# Altium PCB LightSwitch.PcbDoc
Units mm, origin at the board's own origin, x right, y up, seen from the top; angles counter-clockwise.
Board outline 45 x 95 mm, 2 copper layers (Top Layer, Bottom Layer); 22 components, 16 nets, 79 pads, 0 vias.
Unrouted connection lines stored in the file: 38.
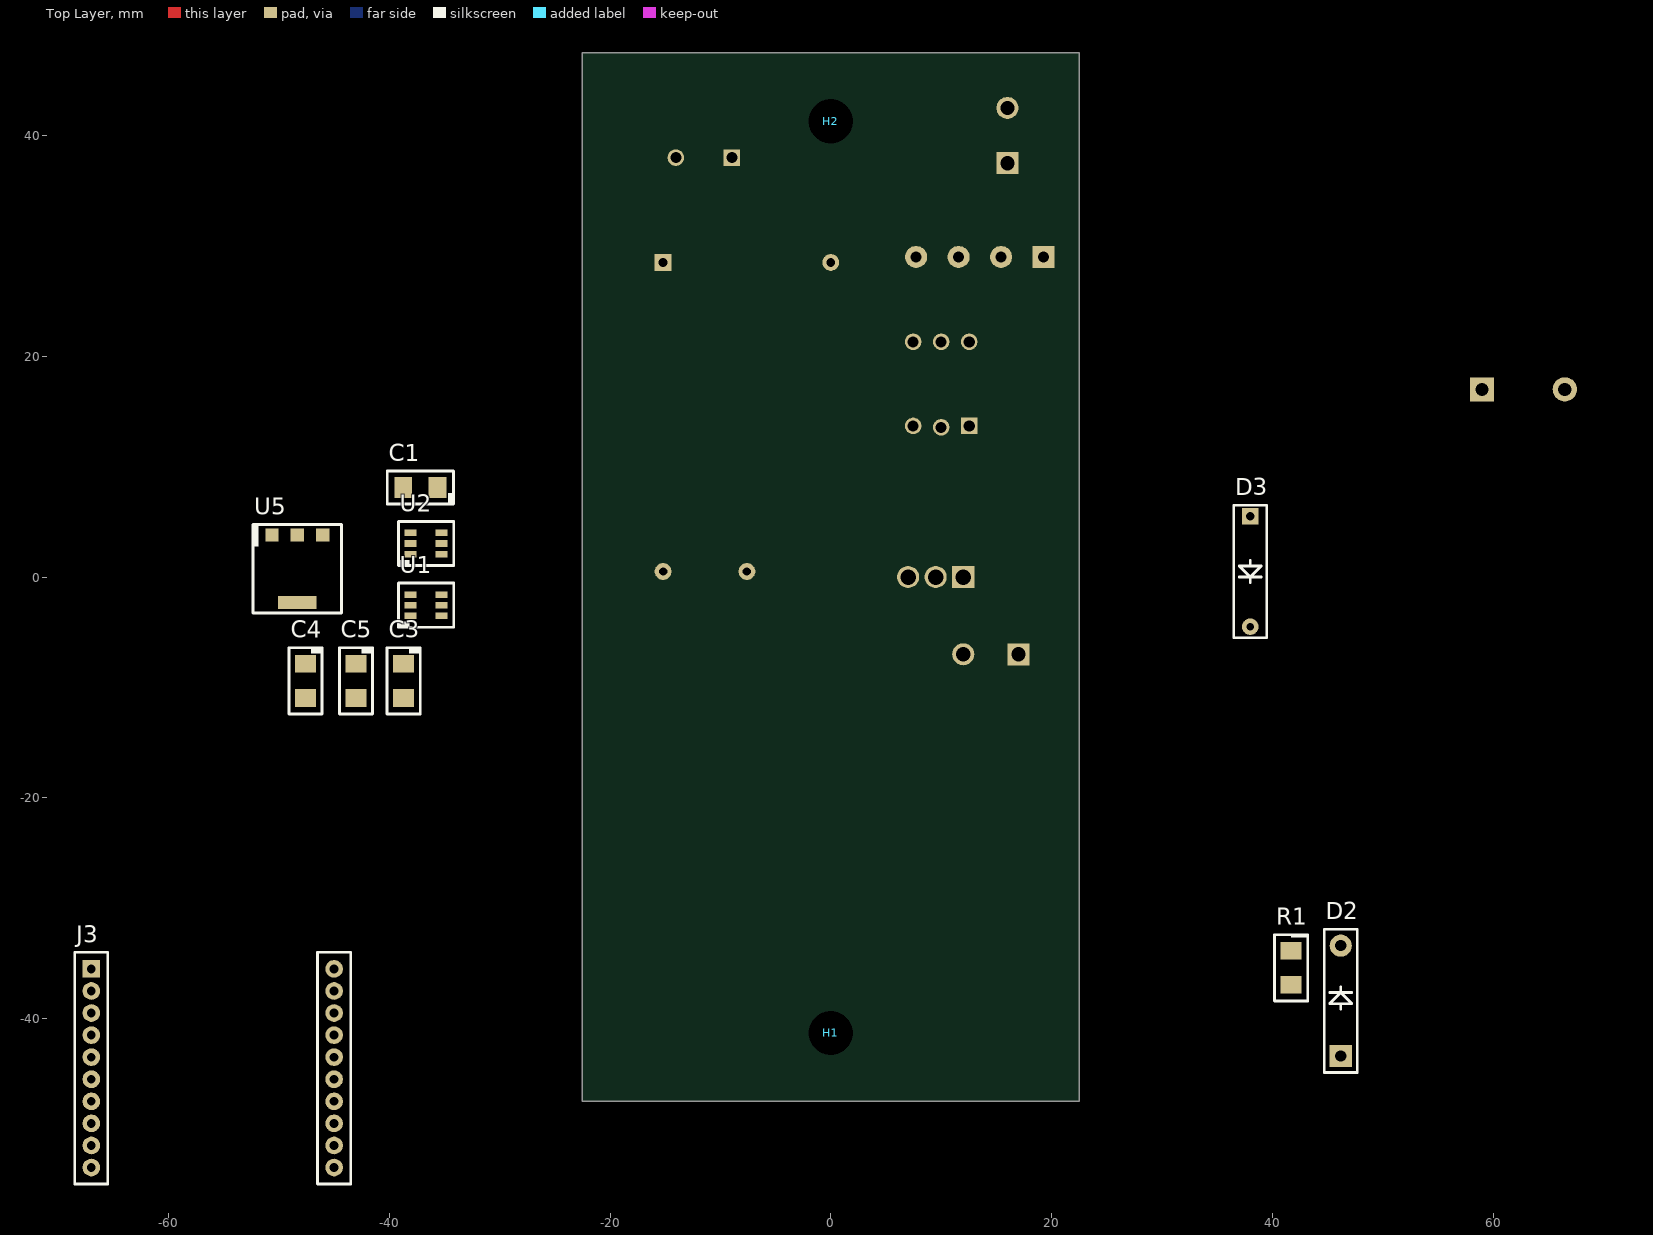
[diagram p0: Top Layer view]
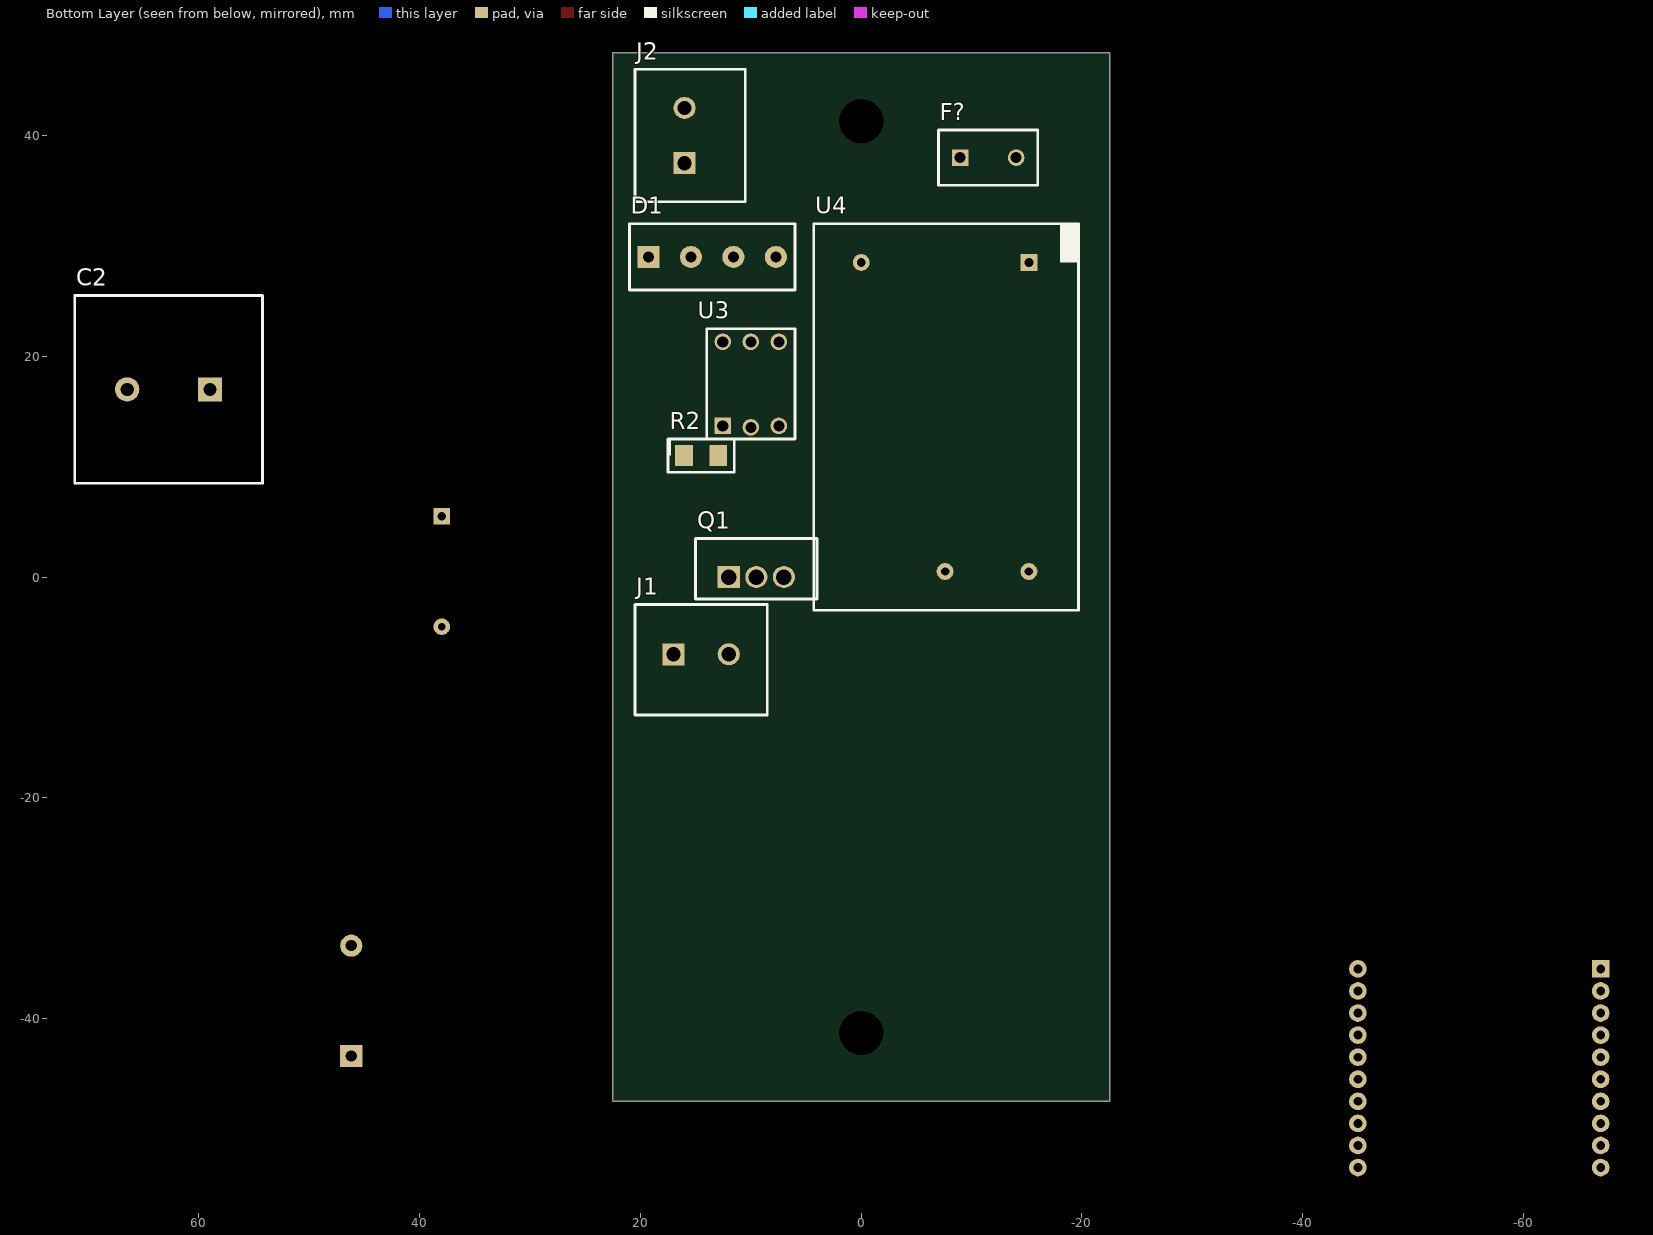
[diagram p1: Bottom Layer view, seen from below]

## Layer stack, top to bottom
Top Solder: solder mask 0.0102, Solder Resist, Dk 3.5
Top Layer: signal copper 0.0356
Dielectric 1: dielectric 0.32, FR-4, Dk 4.8
Bottom Layer: signal copper 0.0356
Bottom Solder: solder mask 0.0102, Solder Resist, Dk 3.5

## Board outline
22.5,-47.5 22.5,47.5 -22.5,47.5 -22.5,-47.5

## Design rules (kind name [scope] priority, off if disabled: settings)
Clearance [All] p1: gap=0.254 ignorepadtopadclearanceinfootprint=FALSE except(0: Arc-Hole Track-Hole SMDPad-Hole THPad-Hole Via-Hole Fill-Hole Poly-Hole Region-Hole Text-Hole)
PolygonConnect [All] p1: connectstyle=Relief reliefconductorwidth=0.254 reliefentries=4 polygonreliefangle="90 Angle" airgapwidth=0.254
RoutingVias [All] p1: holewidth=0.711 width=1.27 viastyle="Through Hole" minholewidth=0.711 minwidth=1.27 maxholewidth=0.711 maxwidth=1.27
SolderMaskExpansion [All] p1: expansion=0.102
Width [All] p1: maxlimit=0.254 minlimit=0.254 preferedwidth=0.254
30 further rules are at their usual default settings.

## Classes and differential pairs
component class XBee: J3
component class Power: C3 C4 C5 F? H1 H2 J2 U4 U5
component class Dimmer: C1 C2 D1 D2 D3 J1 Q1 R1 R2 U1 U2 U3

## Components (designator, comment, footprint, x,y, rotation, side; value= is the part's Value field where it differs from the comment)
C1 "CAP" 1206 -37.178,8.118 r270 top value=.1uF
C2 "CAP" CAPM7 62.75,17 r0 bottom value=100uF
C3 "CAP" 1206 -38.702,-9.408 r0 top value=100uF
C4 "CAP" 1206 -47.592,-9.408 r0 top value=.1uF
C5 "CAP" 1206 -43.02,-9.408 r0 top value=10uF
D1 "KBPM" KBPM 13.5,29 r180 bottom
D2 "DIODE" DO41 46.2,-38.4 r90 top
D3 "ZENER" DO35 38,0.5 r0 top value=10V
F? "F_FUSE_0697H" 0697H -11.5,38 r180 bottom value=2A
H1 "H_MOUNTHOLE_MOUNTHOLE4MM" MOUNTHOLE4MM 0,-41.3 r0 top value=4mm
H2 "H_MOUNTHOLE_MOUNTHOLE4MM" MOUNTHOLE4MM 0,41.3 r0 top value=4mm
J1 "1935161" 1935161 14.5,-7 r180 bottom
J2 "1935161" 1935161 16,40 r90 bottom
J3 "XBee" XBEE -56,-44.5 r0 top
Q1 "Q_IRF510_TO-220AB" TO-220AB 9.5,0 r180 bottom
R1 "R_RES_1206" 1206 41.7,-35.4 r0 top value=100K
R2 "R_RES_1206" 1206 14.5,11 r90 bottom value=180
U1 "MCP4013T-103E/CH" SOT23-6 -36.67,-2.55 r270 top
U2 "LTC6992CS6-2" SOT23-6 -36.67,3.038 r270 top
U3 "MCT27X" DIP6 10,17.5 r90 bottom
U4 "IRM-02-5" IRM-02-5 -15.2,28.5 r270 bottom
U5 "LD1117S33TR" SOT223 -48.34,0.75 r180 top

## Footprints (in the part's own frame and the unit in brackets; to place one, negate y for a bottom-side part, rotate by r counter-clockwise, add the part's x,y. Pads: shape width x height; smd on the part's side, far side on the other; paste and mask are expansions set on the pad)
0697H [mm]
  rect 1.5x1.5 hole 1: 1(-2.54,0)
  round 1.5 hole 1: 2(2.54,0)
  silkscreen extent -4.5,-2.5 4.5,2.5, body extent -4.18,-2 4.18,2, height 8.1
1206 [mm]
  rect 1.9x1.6 smd: 1(0,1.55) 2(0,-1.55)
  silkscreen extent -1.5,-3 1.5,3, body extent -0.8,-1.6 0.8,1.6, height 1.5
1935161 [mm]
  rect 2x2 hole 1.3: 1(-2.5,0)
  round 2 hole 1.3: 2(2.5,0)
  silkscreen extent -6,-5.5 6,4.5, body extent -5.03,-5 5.54,4, height 11.4
CAPM7 [mm]
  rect 2.2x2.2 hole 1.2: 1(-3.75,0)
  round 2.2 hole 1.2: 2(3.75,0)
  silkscreen extent -8.5,-8.5 8.5,8.5, body extent -8.25,-8.25 8.25,8.25, height 26.4
DIP6 [mm]
  rect 1.5x1.5 hole 1: 1(-3.81,2.54)
  round 1.5 hole 1: 2(-3.935,0) 3(-3.81,-2.54) 4(3.81,-2.54) 5(3.81,0) 6(3.81,2.54)
  silkscreen extent -5,-4 5,4, body extent -3.93,-3.63 3.93,3.63, height 4.4
DO35 [mm]
  rect 1.5x1.5 hole 0.75: 1(0,5)
  round 1.5 hole 0.7: 2(0,-5)
  silkscreen extent -1.5,-6 1.5,6, body extent -0.92,-5.36 0.92,5.36, height 2.02
DO41 [mm]
  rect 2x2 hole 1: 1(-5,0)
  round 2 hole 1: 2(5,0)
  silkscreen extent -6.5,-1.5 6.5,1.5, body extent -5.4,-1.01 5.4,1.01, height 3.01
IRM-02-5 [mil] "IRM-02-5"
  rect 60x60 hole 31.5: 1(0,0)
  round 60 hole 31.5: 2(0,-598.43)
  round 60 hole 30: 3(1102.36,0) 4(1102.36,-299.21)
  silkscreen extent -138,-768 1240,177, body extent -112,-736 1215,138, height 591
KBPM [mm]
  rect 2x2 hole 1: 1(-5.775,0)
  round 2 hole 1: 2(-1.925,0) 3(1.925,0) 4(5.775,0)
  silkscreen extent -7.5,-3 7.5,3, body extent -7.29,-2.51 7.29,2.5, height 11.5
MOUNTHOLE4MM [mm]
  round 0 hole 4 unplated: ""(0,0)
SOT23-6 [mm]
  rect 0.6x1.1 smd: 1(0.96,-1.4) 2(0,-1.4) 3(-0.96,-1.4) 4(-0.96,1.4) 5(0,1.4) 6(0.96,1.4)
  silkscreen extent -2,-2.5 2,2.5, body extent -1.5,-1.42 1.5,1.42
SOT223 [mm]
  rect 1.2x1.2 smd: 1(2.3,-3.05) 2(0,-3.05) 3(-2.3,-3.05)
  rect 3.5x1.2 smd: 4(0,3.05)
  silkscreen extent -4,-4 4,4, body extent -3.25,-3.45 3.25,3.45
TO-220AB [mm]
  rect 2x2 hole 1.4: 1(-2.5,0)
  round 2 hole 1.4: 2(0,0) 3(2.5,0)
  silkscreen extent -5.5,-2 5.5,3.5, body extent -5.32,-1.75 5.33,3.05, height 19.5
XBEE [mm]
  rect 1.6x1.6 hole 0.8: 1(-11,9)
  round 1.6 hole 0.8: 2(-11,7) 3(-11,5) 4(-11,3) 5(-11,1) 6(-11,-1) 7(-11,-3) 8(-11,-5) 9(-11,-7) 10(-11,-9) 11(11,-9) 12(11,-7) 13(11,-5) 14(11,-3) 15(11,-1) 16(11,1) 17(11,3) 18(11,5) 19(11,7) 20(11,9)
  silkscreen extent -12.5,-10.5 12.5,10.5, body extent -12,-10 12,10, height 3.99

## Part data
C1 C4: library part C_CAP_1206, Rating=25V
C2: library part C_CAPP_CAPM7, Rating=200V
C3: library part C_CAP_1206, Rating=10V
C5: library part C_CAP_1206, Rating=16V
D1: library part D_KBPM_KBMP
D2: library part D_DIODE_DO41, Rating=1A
D3: library part D_ZENER_DO35, Rating=500mW
F?: Rating=350VAC
J1 J2: library part J_2POSTERM_1935161
J3: library part J_XBEE_XBEE
Q1: Rating=5.6A
R1 R2: Rating=1/4W
U1: library part "U_ MCP4013T-103E/CH_SOT23-6"
U2: library part U_LTC6992CS6-2_SOT23-6
U3: library part U_MCT27X_DIP6
U4: library part U_IRM-02-5_IRM-02-5
U5: library part U_LD1117S33TR_SOT223

## Nets (pads, with @x,y where several pads share a name; then routed paths per layer and width w, separated by ;. In a path a pad name is that pad's centre, name@x,y a point inside that pad or via, vN(x,y) a via of type N, cw(c..) or ccw(c..) an arc to the next point about the centre after c; other vN are vias at no path point)
1V: U1.6
3V3: C5.1 J3.1 U5.2 U5.4
5V: C1.1 C3.1 C4.1 U2.5 U3.1 U4.4 U5.3
AC/L: D1.3 J2.2 U4.2
AC/N: D1.2 F?.2 U4.1
DIM_ANALOG: U1.5 U2.1
DIM_PWM: R2.1 U2.6
GND: C1.2 C3.2 C4.2 C5.2 J3.10 U1.2 U2.2 U2.4 U4.3 U5.1
NetC2_1: C2.1 D2.2 R1.1
NetC2_2: C2.2 D1.4 D3.1 Q1.3 U3.4
NetD1_1: D1.1 D2.1 J1.1
NetD3_2: D3.2 Q1.1 R1.2 U3.5
NetF?_1: F?.1 J2.1
NetJ1_2: J1.2 Q1.2
NetR2_2: R2.2 U3.2
RELAY_CTRL: J3.20
pads on no net: H1. H2. J3.2 J3.3 J3.4 J3.5 J3.6 J3.7 J3.8 J3.9 J3.11 J3.12 J3.13 J3.14 J3.15 J3.16 J3.17 J3.18 J3.19 U1.1 U1.3 U1.4 U2.3 U3.3 U3.6